# EAGLE board Filla_GPS_2015_Rev1 (EAGLE 7.4.0)
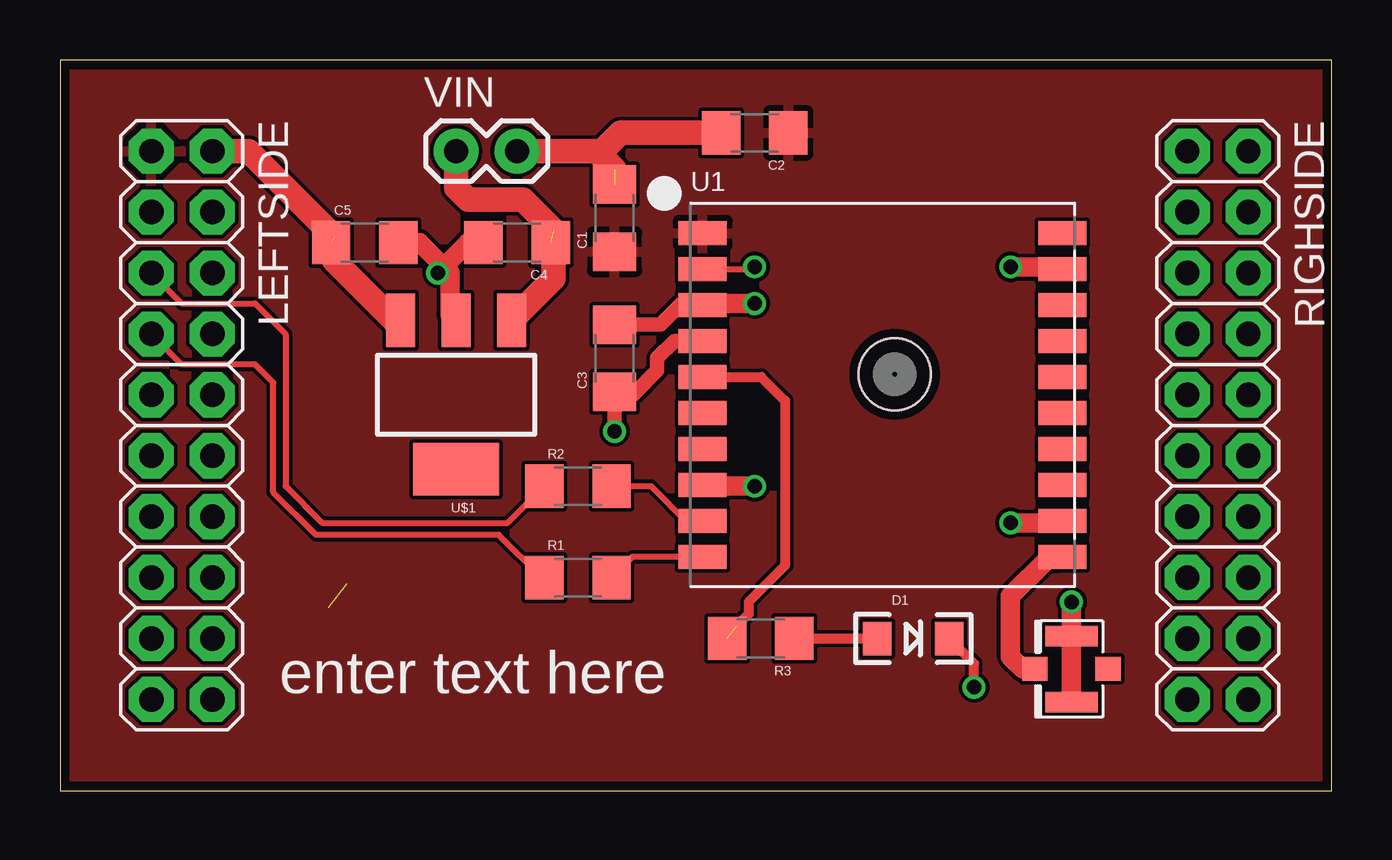
[diagram p0: board, top side]
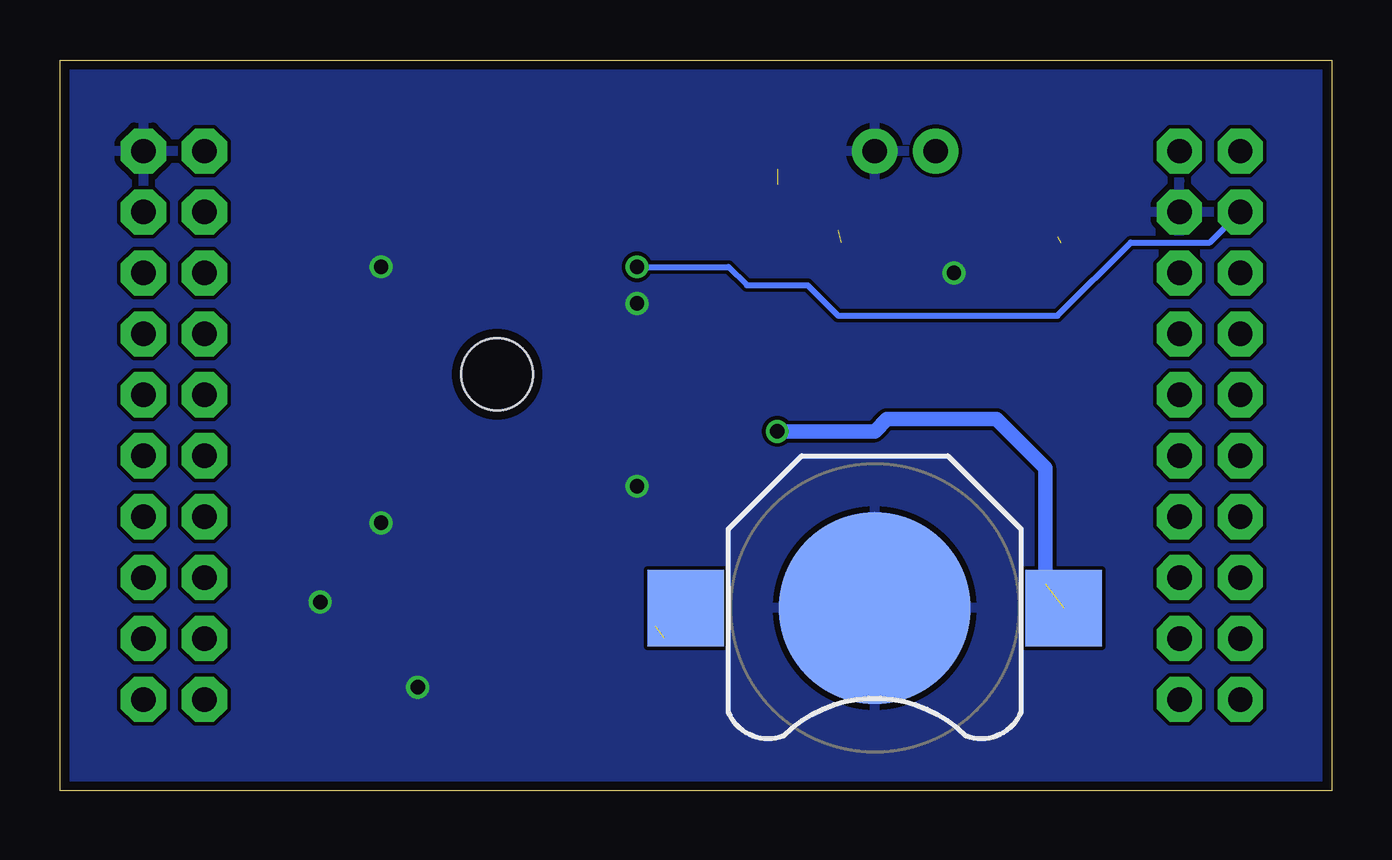
[diagram p1: board, bottom side, seen from below]

Size 53.01 x 30.47 mm. Coordinates in mm from the lower left corner, seen from the top.
Outline: 0,0 53.01,0 53.01,30.47 0,30.47 0,0
Copper layers (1*16): Top 0.0356mm / dielectric 1.5011mm / Bottom 0.0356mm
Design rules "LaenPCBOrder": minimum track width 6mil, minimum drill 13mil, track to track 6mil, track to pad 6mil, pad to pad 6mil, via to via 6mil, smd to smd 6mil, copper to edge 15mil, drill to drill 6mil, minimum pad ring 7mil, minimum via ring 7mil, stop-mask expansion 3mil, vias tented up to drill 0mil, thermal gap 10mil

## Footprints (pad centres in the part's own frame; a part is rotated, then mirrored left to right if it is on the bottom)
1206 = smd 1.6 x 1.8: 1 -1.4,0; 2 1.4,0
BATTCON_12MM = smd 8 x 8: GND 0,0 | smd 3.175 x 3.175: PWR@1 -7.874,0; PWR@2 7.874,0
LED-1206 = smd 1.2 x 1.4: A -1.5,0; C 1.5,0
U.FL = smd 2.2 x 0.85: P$1 0,1.375; P$2 0,-1.375 | smd 1.05 x 1: P$3 1.525,0; P$4 -1.525,0
2X10 = drill 1.016 pad 1.88 octagon: 1 -11.43,-1.27; 2 -11.43,1.27; 3 -8.89,-1.27; 4 -8.89,1.27; 5 -6.35,-1.27; 6 -6.35,1.27; 7 -3.81,-1.27; 8 -3.81,1.27; 9 -1.27,-1.27; 10 -1.27,1.27; 11 1.27,-1.27; 12 1.27,1.27; 13 3.81,-1.27; 14 3.81,1.27; 15 6.35,-1.27; 16 6.35,1.27; 17 8.89,-1.27; 18 8.89,1.27; 19 11.43,-1.27; 20 11.43,1.27
FGPMMOPA6H = smd 2 x 1: P$1 -7.5,6.75; P$2 -7.5,5.25; P$3 -7.5,3.75; P$4 -7.5,2.25; P$5 -7.5,0.75; P$6 -7.5,-0.75; P$7 -7.5,-2.25; P$8 -7.5,-3.75; P$9 -7.5,-5.25; P$10 -7.5,-6.75; P$11 7.5,-6.75; P$12 7.5,-5.25; P$13 7.5,-3.75; P$14 7.5,-2.25; P$15 7.5,-0.75; P$16 7.5,0.75; P$17 7.5,2.25; P$18 7.5,3.75; P$19 7.5,5.25; P$20 7.5,6.75 | hole 3: 0.5,0.85
SOT223 = smd 1.219 x 2.235: 1 -2.311,-3.099; 2 0,-3.099; 3 2.311,-3.099 | smd 3.6 x 2.2: 4 0,3.099
1X02 = drill 1.016 pad 1.88: 1 0,0; 2 2.54,0

## Placement (x,y rotation side)
C1  1uF  [1206]  23.11,23.88 90 top
C2  0.01uF  [1206]  28.96,27.43 180 top
C3  1uF  [1206]  23.11,18.03 90 top
C4  1uF  [1206]  19.05,22.86 180 top
C5  1uF  [1206]  12.7,22.86 0 top
CR1220  3.7V  [BATTCON_12MM]  19.05,7.62 180 bottom
D1  [LED-1206]  35.56,6.35 0 top
J1  U.FL  [U.FL]  42.16,5.08 180 top
LEFTSIDE  [2X10]  5.08,15.24 270 top
R1  330  [1206]  21.59,8.89 0 top
R2  330  [1206]  21.59,12.7 0 top
R3  330  [1206]  29.21,6.35 180 top
RIGHSIDE  [2X10]  48.26,15.24 270 top
U1  [FGPMMOPA6H]  34.29,16.51 0 top
U$1  V_REG_LD1117#50  [SOT223]  16.51,16.51 180 top
VIN  [1X02]  16.51,26.67 0 top

## Library data of the parts
C1-C5 = SparkFun-Capacitors
CR1220 = SparkFun-Electromechanical; PROD_ID: BATT-08044
D1 = SparkFun-LED
J1 = SparkFun-Connectors; PROD_ID: CONN-09193
LEFTSIDE RIGHSIDE VIN = SparkFun-Connectors
R1-R3 = SparkFun-Resistors
U1 = adafruit
U$1 = SparkFun-PowerIC

## Nets
3.3V: C1.1 C2.1 LEFTSIDE.1 U1.P$1
5V: C5.1 LEFTSIDE.2 U$1.3
DATA_IN: LEFTSIDE.7 R1.1
DATA_OUT: LEFTSIDE.5 R2.1
EX_ANT: J1.P$3 U1.P$11
GND: C1.2 C2.2 C3.2 C4.2 C5.2 CR1220.GND D1.C J1.P$1 J1.P$2 LEFTSIDE.4 RIGHSIDE.2 U1.P$3 U1.P$8 U1.P$12 U1.P$19 U$1.2 VIN.2
N$1: R3.2 U1.P$5
N$2: D1.A R3.1
N$3: R2.2 U1.P$9
N$4: R1.2 U1.P$10
NRESET: LEFTSIDE.3 U1.P$2
VBACKUP: C3.1 CR1220.PWR@1 U1.P$4
VIN: C4.1 U$1.1 VIN.1

## Tracks (layer width: path | path; a pad name or v marks a point on that pad's centre or on a via)
3.3V
  pour Top: -3.81,43.18 58.42,43.18 58.42,-8.89 -3.81,-8.89
5V  (1 unrouted)
  Top 1.016: U$1.3 13.92,19.61 11.43,22.1 11.43,23.11 7.87,26.67 LEFTSIDE.2
DATA_IN
  Top 0.254: R1.1 20.07,8.89 18.29,10.67 10.67,10.67 8.89,12.45 8.89,17.02 8.13,17.78 5.08,17.78 LEFTSIDE.7
DATA_OUT
  Top 0.254: LEFTSIDE.5 5.08,20.32 8.13,20.32 9.4,19.05 9.4,12.7 10.92,11.18 18.67,11.18 R2.1
EX_ANT
  Top 0.813: J1.P$3 40.13,5.08 39.62,5.59 39.62,8.13 41.15,9.65 41.68,9.65 U1.P$11
GND  (via drill 0.6)  (1 unrouted)
  Top 0.406: v38.1,4.32 38.1,5.31 D1.C
  Top 0.61: C3.2 25.02,19.43 25.91,20.32 26.73,20.32 U1.P$3
  Top 0.813: C5.2 14.99,22.86 16.26,21.59 | 16.26,21.59 v15.75,21.59 17.02,22.86 C4.2 | 16.26,21.59 16.26,19.86 U$1.2 | v39.62,21.84 41.71,21.84 U1.P$19 | v39.62,11.18 41.71,11.18 U1.P$12 | v28.96,12.7 26.85,12.7 U1.P$8 | v28.96,20.32 26.85,20.32 U1.P$3 | v42.16,7.87 J1.P$2 J1.P$1
  Top 1.016: VIN.2 22.35,26.67 22.48,26.54 | 22.48,26.54 23.11,25.91 | C2.2 23.37,27.43 22.48,26.54
  pour Bottom: -5.08,43.18 58.42,43.18 58.42,-8.89 -5.08,-8.89
N$1  (1 unrouted)
  Top 0.406: U1.P$5 29.22,17.26 30.23,16.26 30.23,9.4 28.7,7.87 28.7,7.37 28.19,6.86
N$2
  Top 0.406: R3.1 D1.A
N$3
  Top 0.254: R2.2 24.64,12.7 26.16,11.18 26.71,11.18 U1.P$9
N$4
  Top 0.254: U1.P$10 23.86,9.76 R1.2
NRESET  (via drill 0.6)
  Top 0.254: U1.P$2 28.87,21.76 v28.96,21.84
  Bottom 0.254: v28.96,21.84 25.15,21.84 24.38,21.08 21.84,21.08 20.57,19.81 11.43,19.81 8.38,22.86 5.08,22.86 LEFTSIDE.3
VBACKUP  (via drill 0.6)  (1 unrouted)
  Top 0.61: U1.P$4 25.62,18.76 24.89,18.03 24.89,17.53 23.88,16.51 23.24,16.51 C3.1 v23.11,14.99
  Bottom 0.61: v23.11,14.99 19.05,14.99 18.54,15.49 13.97,15.49 11.94,13.46 11.94,8.64
VIN  (1 unrouted)
  Top 1.016: VIN.1 16.51,25.15 17.02,24.64 19.3,24.64 20.57,23.37 20.57,21.36 U$1.1

## Text on the board
tNames: enter text here